# Altium PCB BOARDError.PcbDoc
Units mil, origin at the board's own origin, x right, y up, seen from the top; angles counter-clockwise.
Board outline 4100 x 2535 mil, 2 copper layers (Top Layer, Bottom Layer); 142 components, 97 nets, 538 pads, 0 vias.
Unrouted connection lines stored in the file: 16.
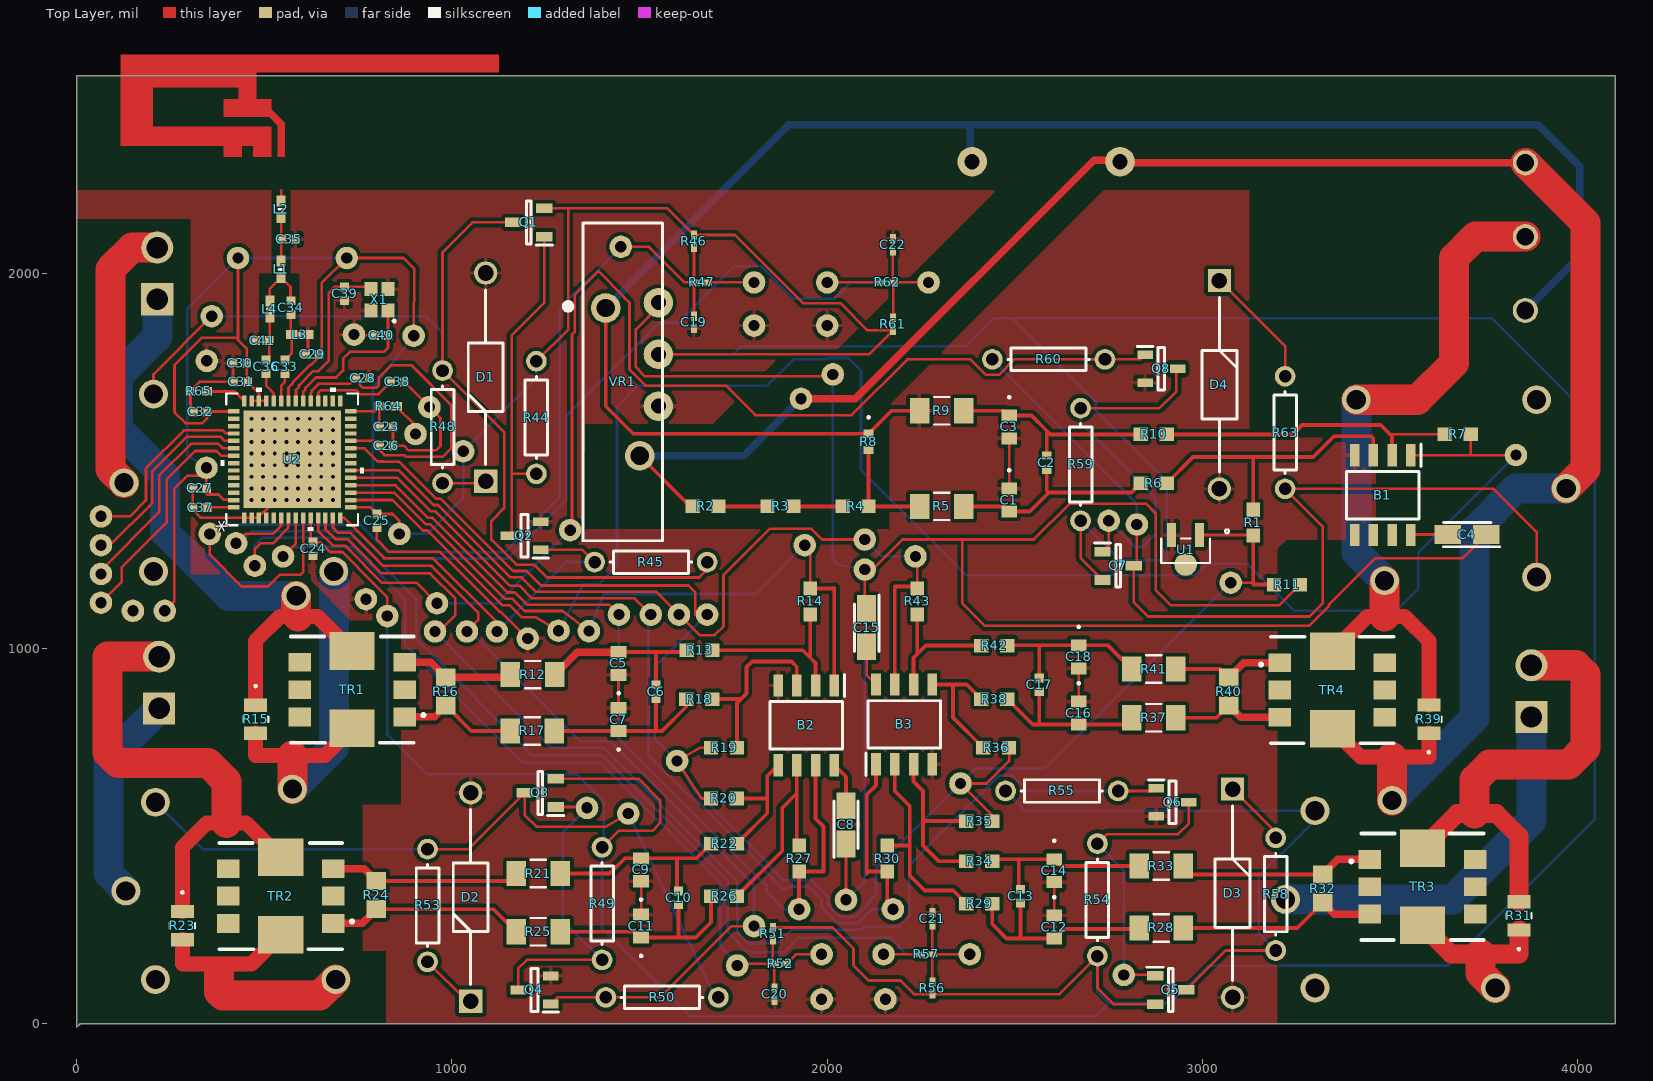
[diagram p0: Top Layer view]
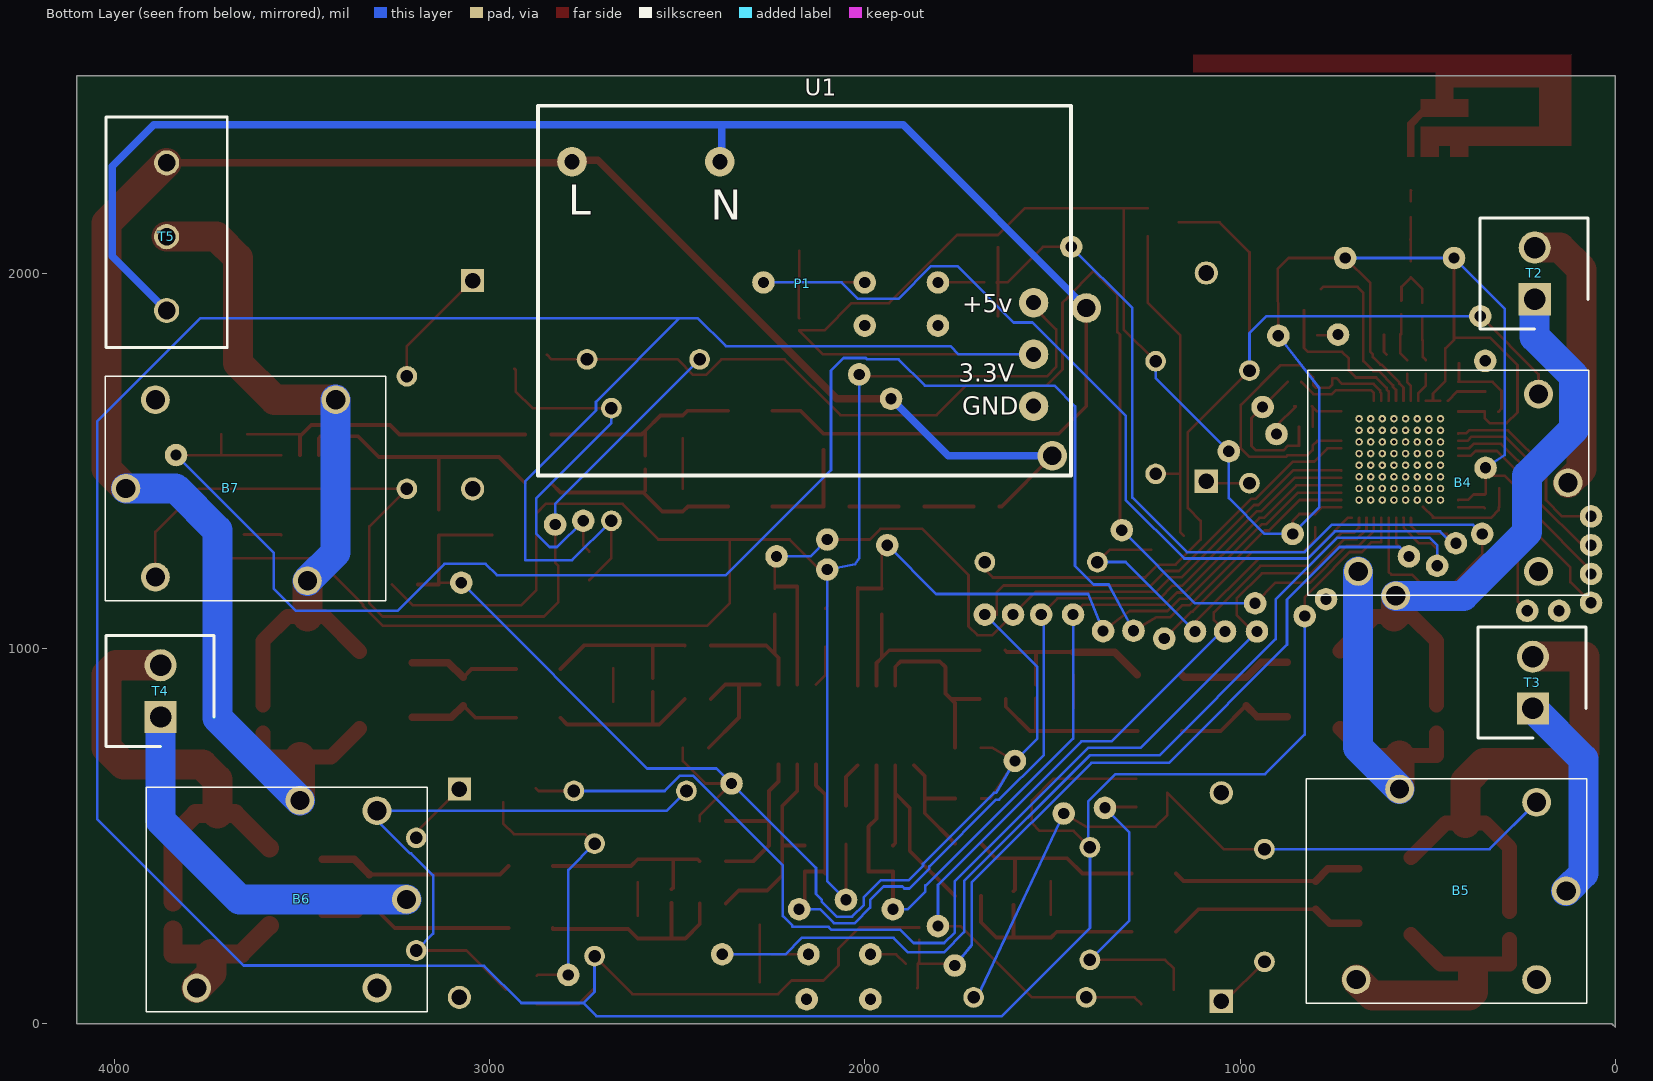
[diagram p1: Bottom Layer view, seen from below]

## Layer stack, top to bottom
Top Solder: solder mask 0.4, Solder Resist, Dk 3.5
Top Layer: signal copper 1.4
Dielectric 1: dielectric 12.6, FR-4, Dk 4.8
Bottom Layer: signal copper 1.4
Bottom Solder: solder mask 0.4, Solder Resist, Dk 3.5

## Board outline
0,2525 4100,2525 4100,0 10,0 0,-10

## Design rules (kind name [scope] priority, off if disabled: settings)
Clearance [All] p1: gap=10 ignorepadtopadclearanceinfootprint=FALSE except(0: Arc-Hole Track-Hole SMDPad-Hole THPad-Hole Via-Hole Fill-Hole Poly-Hole Region-Hole Text-Hole; 7: SMDPad-SMDPad)
PolygonConnect [All] p1: connectstyle=Relief reliefconductorwidth=10 reliefentries=4 polygonreliefangle="90 Angle" airgapwidth=10
RoutingVias [All] p1: holewidth=28 width=50 viastyle="Through Hole" minholewidth=28 minwidth=50 maxholewidth=28 maxwidth=50
ShortCircuit "Antenna Short" [InNet('Antenna') vs InNet('GND')] p1: allowed=TRUE
ShortCircuit "Neutral Short" [InNet('NEUTRAL_IN') vs InNet('GND')] p2: allowed=TRUE
ShortCircuit [All] p3: allowed=FALSE
SolderMaskExpansion [All] p1: expansion=4
Width [All] p1: maxlimit=80 minlimit=7 preferedwidth=20 minimp=50.000000 maximp=50.000000 favimp=50.000000
29 further rules are at their usual default settings.

## Classes and differential pairs
component class Sheet3: B3 C12 C13 C14 C15 C16 C17 C18 R28 R29 R30 R31 R32 R33 R34 R35 R36 R37 R38 R39 R40 R41 R42 R43 T4 T5 TR3 TR4
component class Sheet2: C5 C6 C7 C8 C9 C10 C11 R12 R13 R14 R15 R16 R17 R18 R19 R20 R21 R22 R23 R24 R25 R27 T5 TR1
component class Sheet1: B1 C2 C4 R1 R2 R3 R4 R5 R6 R7 R8 R9 R10 R11 U1
component class RSheet4: B7 C22 D4 Q7 Q8 R59 R60 R61 R62 R63
component class RSheet3: B6 C21 D3 Q5 Q6 R54 R55 R56 R57 R58
component class RSheet2: C20 D2 Q3 Q4 R49 R50 R51 R52 R53
component class RSheet1: B4 C19 D1 Q1 Q2 R44 R45 R46 R47 R48
component class ChipSheet1: C23 C24 C26 C28 C29 C30 C31 C32 C33 C34 C35 C36 C37 C38 L1 L3 L4 R64 R65

## Components (designator, comment, footprint, x,y, rotation, side; value= is the part's Value field where it differs from the comment)
B1 "LM2904AQS-13" SOIC127P600X175-8N 3480,1408.25 r270 top
B2 "LM2904AQS-13" SOIC127P600X175-8N 1944,795 r270 top
B3 "LM2904AQS-13" SOIC127P600X175-8N 2205,797.5 r90 top
B4 "HF3FA_005-HTF" HF3FA005HTF 126.26,1441.22 r0 bottom locked
B5 "HF3FA_005-HTF" HF3FA005HTF 131.26,353.78 r0 bottom
B6 "HF3FA_005-HTF" HF3FA005HTF 3220.94,331.22 r0 bottom
B7 "HF3FA_005-HTF" HF3FA005HTF 3968.74,1426.22 r180 bottom locked
C1 "06035A470JAT2A" 0603-M 2485,1395 r270 top value=47pF
C2 "CC0402JRX7R7BB153" CAPC1005X55N 2585,1495 r270 top value=15nF
C3 "06035A470JAT2A" 0603-M 2485,1590 r270 top value=47pF
C4 "TAJA225K020RNJ" CAPPM3216X180N 3705,1303.25 r180 top value=2.2uF
C5 "06035A470JAT2A" 0603-M 1444,960 r90 top value=47pF
C6 "CC0402JRX7R7BB153" CAPC1005X55N 1544,885 r90 top value=15nF
C7 "06035A470JAT2A" 0603-M 1444,810 r90 top value=47pF
C8 "TAJA225K020RNJ" CAPPM3216X180N 2050,530 r90 top value=2.2uF
C9 "06035A470JAT2A" 0603-M 1504,410 r90 top value=47pF
C10 "CC0402JRX7R7BB153" CAPC1005X55N 1604,335 r90 top value=15nF
C11 "06035A470JAT2A" 0603-M 1504,260 r90 top value=47pF
C12 "06035A470JAT2A" 0603-M 2605,257.5 r270 top value=47pF
C13 "CC0402JRX7R7BB153" CAPC1005X55N 2515,340 r270 top value=15nF
C14 "06035A470JAT2A" 0603-M 2605,407.5 r270 top value=47pF
C15 "TAJA225K020RNJ" CAPPM3216X180N 2105,1055 r270 top value=2.2uF
C16 "06035A470JAT2A" 0603-M 2670,827.5 r270 top value=47pF
C17 "CC0402JRX7R7BB153" CAPC1005X55N 2565,902.5 r270 top value=15nF
C18 "06035A470JAT2A" 0603-M 2670,977.5 r270 top value=47pF
C19 "Cap2" RESC0603X26N 1645,1868.78 r270 top value=0.1uF
C20 "Cap2" RESC0603X26N 1860,78.78 r270 top value=0.1uF
C21 "Cap2" RESC0603X26N 2280,280 r90 top value=0.1uF
C22 "Cap2" RESC0603X26N 2175,2075 r90 top value=0.1uF
C23 "GRM155R71H102KA01D" CAPC1005X55N 825,1590 r180 top value=1000pF
C24 "GRM155R70J104KA01D" CAPC1005X55N 630,1265 r90 top value=0.1uF
C25 "GRM155R70J104KA01D" CAPC1005X55N 800,1340 r90 top value=0.1uF
C26 "GRM155R70J104KA01D" CAPC1005X55N 825,1540 r180 top value=0.1uF
C27 "GRM155R61A105KE1" CAPC1005X55N 328,1426 r0 top value=1uF
C28 "GRM155R70J104KA01D" CAPC1005X55N 761.89,1720 r180 top value=0.1uF
C29 "GRM155R70J104KA01D" CAPC1005X55N 628,1783 r0 top value=0.1uF
C30 "GRM1555C1H221JA01D" CAPC1005X55N 435,1760 r0 top value=220pF
C31 "GRM155R70J104KA01D" CAPC1005X55N 436.89,1710 r0 top value=0.1uF
C32 "GRM155R70J104KA01D" CAPC1005X55N 330,1630 r0 top value=0.1uF
C33 "GRM1555C1H180JA01D" CAPC1005X55N 555,1750 r90 top
C34 "GRM1555C1H1R0BA01D" CAPC1005X55N 571,1908 r90 top
C35 "GRM1555C1H1R2CA01D" CAPC1005X55N 565,2090 r180 top
C36 "GRM1555C1H180JA01D" CAPC1005X55N 505,1750 r90 top
C37 "GRM155R61A105KE1" CAPC1005X55N 329,1375 r0 top value=1uF
C38 "GRM155R61A105KE1" CAPC1005X55N 855,1710 r180 top value=1uF
C39 "GRM1555C1H120JA01D" CAPC1005X55N 714,1944.89 r90 top value=12pF
C40 "GRM1555C1H120JA01D" CAPC1005X55N 812,1834 r0 top value=12pF
C41 "GRM1555C1H1R0BA01D" CAPC1005X55N 495,1820 r0 top
D1 "1N4007" DIOAD1408W86L464D236 1090,1445 r90 top
D2 "1N4007" DIOAD1408W86L464D236 1050,59.88 r90 top
D3 "1N4007" DIOAD1408W86L464D236 3080,625.12 r270 top
D4 "1N4007" DIOAD1408W86L464D236 3045,1980 r270 top
L1 "LQG15HS2N0S02D" INDC1005X55N 545,2010 r90 top
L2 "LQG15HS3N3S02D" INDC1005X55N 545,2170 r90 top
L3 "LQG15HS2N0S02D" INDC1005X55N 595,1836 r180 top
L4 "LQG15HS2N0S02D" INDC1005X55N 515,1904 r90 top
P1 "Relay" BT_SMPS 2170,1965 r180 bottom locked
Q1 "DMG2305UX" SOT96P240X100-3N 1205,2135 r180 top
Q2 "2N7002" SOT95P230X110-3N 1193.31,1300 r180 top
Q3 "DMG2305UX" SOT96P240X100-3N 1235,615 r180 top
Q4 "2N7002" SOT95P230X110-3N 1220,90 r180 top
Q5 "DMG2305UX" SOT96P240X100-3N 2915,90 r0 top
Q6 "2N7002" SOT95P230X110-3N 2920,590 r0 top
Q7 "DMG2305UX" SOT96P240X100-3N 2775,1220 r0 top
Q8 "2N7002" SOT95P230X110-3N 2890,1745 r0 top
R1 "RT0603DRD07330KL" RC0603N-M 3135,1335 r270 top value=330K
R2 "RT0603DRD07330KL" RC0603N-M 1676,1378.25 r0 top value=330K
R3 "RT0603DRD07330KL" RC0603N-M 1875.5,1378.25 r0 top value=330K
R4 "RT0603DRD07330KL" RC0603N-M 2075.5,1378.25 r0 top value=330K
R5 "RC1206FR-071KL" RC1206N-M 2305,1378.25 r180 top value=1k
R6 "RT0603DRD07330KL" RC0603N-M 2870,1440 r0 top value=330K
R7 "RT0603DRD07330KL" RC0603N-M 3680,1570 r0 top value=330K
R8 "RR0510P-302-D" RES_0510-M 2110,1550 r270 top value=3.0K
R9 "RC1206FR-071KL" RC1206N-M 2305,1633.25 r180 top value=1K
R10 "RT0603DRD07330KL" RC0603N-M 2870,1570 r0 top value=330K
R11 "RC0603FR-071KL" RC0603N-M 3225,1170 r180 top value=1K
R12 "RC1206FR-071KL" RC1206N-M 1215,930 r180 top value=1K
R13 "RT0603DRD07330KL" RC0603N-M 1660,995 r0 top value=330K
R14 "RT0603DRD07330KL" RC0603N-M 1955,1125 r90 top value=330K
R15 "KRL1220E-M-R010-F-T5" RES_1220-M 477,811.35 r270 top value=10m
R16 "RT0805DRD0710RL" RC0805N-M 984,885 r90 top value=10
R17 "RC1206FR-071KL" RC1206N-M 1214,780 r180 top value=1K
R18 "RT0603DRD07330KL" RC0603N-M 1659,865 r0 top value=330K
R19 "RT0603DRD07330KL" RC0603N-M 1725,735 r180 top value=330K
R20 "RT0603DRD07330KL" RC0603N-M 1724.5,600 r180 top value=330K
R21 "RC1206FR-071KL" RC1206N-M 1230,400 r180 top value=1K
R22 "RT0603DRD07330KL" RC0603N-M 1725,480 r0 top value=330K
R23 "KRL1220E-M-R010-F-T5" RES_1220-M 282,261.35 r270 top value=10m
R24 "RT0805DRD0710RL" RC0805N-M 799,342.5 r90 top value=10
R25 "RC1206FR-071KL" RC1206N-M 1230,245 r180 top value=1K
R26 "RT0603DRD07330KL" RC0603N-M 1725,340 r0 top value=330K
R27 "RT0603DRD07330KL" RC0603N-M 1925,440 r270 top value=330K
R28 "RC1206FR-071KL" RC1206N-M 2890,255 r0 top value=1K
R29 "RT0603DRD07330KL" RC0603N-M 2405,320 r180 top value=330K
R30 "RT0603DRD07330KL" RC0603N-M 2160,440 r270 top value=330K
R31 "KRL1220E-M-R010-F-T5" RES_1220-M 3843,287 r90 top value=10m
R32 "RT0805DRD0710RL" RC0805N-M 3320,360 r270 top value=10
R33 "RC1206FR-071KL" RC1206N-M 2890,420 r0 top value=1K
R34 "RT0603DRD07330KL" RC0603N-M 2405,432.5 r180 top value=330K
R35 "RT0603DRD07330KL" RC0603N-M 2405,540 r0 top value=330K
R36 "RT0603DRD07330KL" RC0603N-M 2450,735 r0 top value=330K
R37 "RC1206FR-071KL" RC1206N-M 2870,815 r0 top value=1K
R38 "RT0603DRD07330KL" RC0603N-M 2445,865 r180 top value=330K
R39 "KRL1220E-M-R010-F-T5" RES_1220-M 3603,811.5 r90 top value=10m
R40 "RT0805DRD0710RL" RC0805N-M 3070,885 r270 top value=10
R41 "RC1206FR-071KL" RC1206N-M 2870,945 r0 top value=1K
R42 "RT0603DRD07330KL" RC0603N-M 2445,1007.5 r180 top value=330K
R43 "RT0603DRD07330KL" RC0603N-M 2240,1125 r90 top value=330K
R44 "Res1" AXIAL-0.3 1225,1615 r90 top value=1K
R45 "Res1" AXIAL-0.3 1530,1230 r180 top value=10K
R46 "Res1" RESC0603X26N 1645,2085 r90 top value=100K
R47 "Res1" RESC0603X26N 1665,1975 r0 top value=1K
R48 "" AXIAL-0.3 975,1590 r90 top value=33
R49 "Res1" AXIAL-0.3 1400,320 r90 top value=1K
R50 "Res1" AXIAL-0.3 1560,70 r180 top value=10K
R51 "Res1" RESC0603X26N 1855,240 r90 top value=100K
R52 "Res1" RESC0603X26N 1875,160 r0 top value=1K
R53 "" AXIAL-0.3 935,315 r90 top value=33
R54 "Res1" AXIAL-0.3 2720,330 r270 top value=1K
R55 "Res1" AXIAL-0.3 2625,620 r0 top value=10K
R56 "Res1" RESC0603X26N 2280,95 r270 top value=100K
R57 "Res1" RESC0603X26N 2263.78,185 r180 top value=1K
R58 "" AXIAL-0.3 3195,345 r270 top value=33
R59 "Res1" AXIAL-0.3 2675,1490 r270 top value=1K
R60 "Res1" AXIAL-0.3 2590,1770 r0 top value=10K
R61 "Res1" RESC0603X26N 2175,1863.78 r270 top value=100K
R62 "Res1" RESC0603X26N 2160,1975 r180 top value=1K
R63 "" AXIAL-0.3 3220,1575 r270 top value=33
R64 "CRCW04022K20JNED" RESC1005X40N#1 830,1645 r0 top value=2.2k
R65 "RK73H1ETTP5602F" RESC1005X40N#2 325,1685 r0 top value=56k
T2 "1727010" SHDR2W90P0X350_1X2_750X730X850P 215,1930 r90 bottom (schematic designator T5)
T3 "1727010" SHDR2W90P0X350_1X2_750X730X850P 220,840 r90 bottom
T4 "1727010" SHDR2W90P0X350_1X2_750X730X850P 3876.06,817.2 r90 bottom locked
T5 "282836-3" 282836-3 3860,2293.7 r270 bottom locked (schematic designator T2)
TR1 "53100C" 53050C 734,890 r90 top
TR2 "53100C" 53050C 544,340 r90 top
TR3 "53100C" 53050C 3586.04,364.83 r270 top
TR4 "53100C" 53050C 3346.04,889 r270 top
U1 "LM4041D12IDBZR" DBZ3-M 2955,1260 r180 top value=Value
U2 "CC2538_RTQ_56" RTQ56_6P7X6P7 574.5,1503.5 r90 top locked value=Value
VR1 "B72220S0271K101" B722(21.5X5.4) 1455,1710 r270 top
X1 "FA-128_32.0000MF20X-K3" FA128 807,1929 r90 top

## Footprints (in the part's own frame and the unit in brackets; to place one, negate y for a bottom-side part, rotate by r counter-clockwise, add the part's x,y. Pads: shape width x height; smd on the part's side, far side on the other; paste and mask are expansions set on the pad)
0603-M [mil]
  rect 32x42 smd paste+0 mask+0: 1(-30.5,0) 2(30.5,0)
  silkscreen extent -82,-3 -77,3, body extent 0,0 10,10, height 10
53050C [mm]
  rect 1.27x1.52 smd: 1(-1.85,-3.555) 2(0,-3.555) 3(1.85,-3.555) 4(1.85,3.555) 5(0,3.555) 6(-1.85,3.555)
  rect 2.54x3.05 smd: 7(2.615,0) 8(-2.615,0)
  silkscreen extent -3.6,-4.9 3.6,4.15
282836-3 [mm]
  round 1.7 hole 1.2: 1(0,0) 2(5,0) 3(10,0)
  silkscreen extent -3.1,-4.1 12.5,4.1
AXIAL-0.3 [mm] "Axial Device, Thru-Hole; 2 Leads; 0.3 in Pin Spacing"
  round 1.4 hole 0.85: 1(-3.81,0) 2(3.81,0)
  silkscreen extent -2.77,-0.76 2.77,0.76
B722(21.5X5.4) [mm]
  round 2 hole 1.25: 1(-5,-1.15) 2(5,1.15)
  silkscreen extent -10.75,-3.91 10.75,2.7
BT_SMPS [mm]
  round 2 hole 1.02: 1(-15.494,8.423) 2(-5.491,8.423) 3(15.743,-1.118) 4(15.743,-4.615) 5(15.743,-8.118)
  silkscreen extent -17.79,-12.81 18.28,12.21
CAPC1005X55N [mm]
  rect 0.6x0.62 smd: 1(-0.46,0) 2(0.46,0)
CAPPM3216X180N [mm]
  rect 1.8x1.3 smd: 1(-1.3,0) 2(1.3,0)
  silkscreen extent -2.2,-0.82 1.6,0.82
DBZ3-M [mil]
  rect 24x64 smd paste+0 mask+0: 1(-37.4,-42) 2(37.4,-42)
  round 60 smd: 3(0,36.75)
  silkscreen extent -115,-57 65,33, body extent 0,0 10,10, height 10
DIOAD1408W86L464D236 [mm]
  rect 1.575x1.575 / inner round 1.575 / far side rect 1.575x1.575 hole 1.05: 1(0,0)
  round 1.575 hole 1.05: 2(14.1,0)
  silkscreen extent 1.14,-1.18 12.96,1.18
FA128 [mm]
  rect 0.95x0.85 smd: 1(-0.725,-0.575) 2(0.725,-0.575) 3(0.725,0.575) 4(-0.725,0.575)
  silkscreen extent -1.49,-1.04 -1.41,-0.96
HF3FA005HTF [mm]
  round 1.95 hole 1.3: 1(2,-6) 2(0,0) 3(2,6) 4(14.2,6)
  silkscreen extent -1.4,-7.6 17.6,7.6
INDC1005X55N [mm]
  rect 0.75x0.6 smd: 1(-0.55,0) 2(0.55,0)
  silkscreen extent 0,-0.15 0,0.15
RC0603N-M [mil]
  rect 38x36 smd paste+0 mask+0: 1(-34.5,0) 2(34.5,0)
  body extent 0,0 10,10, height 10
RC0805N-M [mil]
  rect 48x52 smd paste+0 mask+0: 1(-37.5,0) 2(37.5,0)
  body extent 0,0 10,10, height 10
RC1206N-M [mil]
  rect 52x67 smd paste+0 mask+0: 1(-59,0) 2(59,0)
  silkscreen extent -20,-36 20,36, body extent 0,0 10,10, height 10
RES_0510-M [mil]
  rect 21.84x25.65 smd paste+0 mask+0: 1(-21.75,0) 2(21.75,0)
  silkscreen extent -69,-3 -63,3, body extent 0,0 10,10, height 10
RES_1220-M [mil]
  rect 35.62x61.09 smd paste+0 mask+0: 1(-37.5,0) 2(37.5,0)
  silkscreen extent -91,-34 7,34, body extent 0,0 10,10, height 10
RESC0603X26N [mm]
  rect 0.625x0.4 smd: 1(-0.412,0) 2(0.412,0)
RESC1005X40N#1 [mm]
  rect 0.75x0.6 smd: 1(-0.55,0) 2(0.55,0)
RESC1005X40N#2 [mm]
  rect 0.7x0.6 smd: 1(-0.55,0) 2(0.55,0)
RTQ56_6P7X6P7 [mil]
  rect 29.68x11.81 smd paste-5.91: 1(-155.93,127.95) 2(-155.93,108.27) 3(-155.93,88.58) 4(-155.93,68.9) 5(-155.93,49.21) 6(-155.93,29.53) 7(-155.93,9.84) 8(-155.93,-9.84) 9(-155.93,-29.53) 10(-155.93,-49.21) 11(-155.93,-68.9) 12(-155.93,-88.58) 13(-155.93,-108.27) 14(-155.93,-127.95) 29(155.93,-127.95) 30(155.93,-108.27) 31(155.93,-88.58) 32(155.93,-68.9) 33(155.93,-49.21) 34(155.93,-29.53) 35(155.93,-9.84) 36(155.93,9.84) 37(155.93,29.53) 38(155.93,49.21) 39(155.93,68.9) 40(155.93,88.58) 41(155.93,108.27) 42(155.93,127.95)
  rect 11.81x29.68 smd paste-5.91: 15(-127.99,-155.93) 16(-108.3,-155.93) 17(-88.61,-155.93) 18(-68.91,-155.93) 19(-49.22,-155.93) 20(-29.53,-155.93) 21(-9.84,-155.93) 22(9.84,-155.93) 23(29.53,-155.93) 24(49.22,-155.93) 25(68.91,-155.93) 26(88.61,-155.93) 27(108.3,-155.93) 28(127.99,-155.93) 43(127.99,155.93) 44(108.3,155.93) 45(88.61,155.93) 46(68.91,155.93) 47(49.22,155.93) 48(29.53,155.93) 49(9.84,155.93) 50(-9.84,155.93) 51(-29.53,155.93) 52(-49.22,155.93) 53(-68.91,155.93) 54(-88.61,155.93) 55(-108.3,155.93) 56(-127.99,155.93)
  rect 259.84x259.84 smd paste-129.42 mask-129.5: 57(0,0)
  round 20 / inner round 60 / far side round 20 hole 10: V(-108.5,-108.5) V(-108.5,-77.5) V(-108.5,-46.5) V(-108.5,-15.5) V(-108.5,15.5) V(-108.5,46.5) V(-108.5,77.5) V(-108.5,108.5) V(-77.5,-108.5) V(-77.5,-77.5) V(-77.5,-46.5) V(-77.5,-15.5) V(-77.5,15.5) V(-77.5,46.5) V(-77.5,77.5) V(-77.5,108.5) V(-46.5,77.5) V(-46.5,108.5) V(-46.5,-46.5) V(-46.5,-15.5) V(-46.5,15.5) V(-46.5,46.5) V(-46.5,-108.5) V(-46.5,-77.5) V(-15.5,108.5) V(-15.5,77.5) V(-15.5,46.5) V(-15.5,15.5) V(-15.5,-15.5) V(-15.5,-46.5) V(-15.5,-77.5) V(-15.5,-108.5) V(15.5,108.5) V(15.5,77.5) V(15.5,46.5) V(15.5,15.5) V(15.5,-15.5) V(15.5,-46.5) V(15.5,-77.5) V(15.5,-108.5) V(46.5,77.5) V(46.5,108.5) V(46.5,-46.5) V(46.5,-15.5) V(46.5,15.5) V(46.5,46.5) V(46.5,-108.5) V(46.5,-77.5) V(77.5,-108.5) V(77.5,-77.5) V(77.5,-46.5) V(77.5,-15.5) V(77.5,15.5) V(77.5,46.5) V(77.5,77.5) V(77.5,108.5) V(108.5,-108.5) V(108.5,-77.5) V(108.5,-46.5) V(108.5,-15.5) V(108.5,15.5) V(108.5,46.5) V(108.5,77.5) V(108.5,108.5)
  silkscreen extent -191,-191 191,191, body extent 0,0 10,10, height 10
SHDR2W90P0X350_1X2_750X730X850P [mm]
  rect 2.175x2.175 / inner round 2.175 / far side rect 2.175x2.175 hole 1.45: 1(0,0)
  round 2.175 hole 1.45: 2(3.5,0)
  silkscreen extent -2,-3.6 5.5,3.7
SOIC127P600X175-8N [mm]
  rect 1.5x0.65 smd: 1(-2.7,1.905) 2(-2.7,0.635) 3(-2.7,-0.635) 4(-2.7,-1.905) 5(2.7,-1.905) 6(2.7,-0.635) 7(2.7,0.635) 8(2.7,1.905)
  silkscreen extent -3.45,-2.45 1.6,2.58
SOT95P230X110-3N [mm]
  rect 1.05x0.6 smd: 1(-1.1,0.95) 2(-1.1,-0.95) 3(1.1,0)
  silkscreen extent -1.63,-1.45 0.23,1.5
SOT96P240X100-3N [mm]
  rect 1.1x0.65 smd: 1(-1.05,0.96) 2(-1.05,-0.96) 3(1.05,0)
  silkscreen extent -1.6,-1.45 0.15,1.54

## Part data
B1 B2 B3: library part LM2904AS-13, "https://www.diodes.com/assets/Datasheets/LM2902_04.pdf", Manufacturer_Name="Diodes Inc.", Datasheet Link=https://www.diodes.com/assets/Datasheets/LM2902_04.pdf, Geometry.Height=1.75mm, Manufacturer_Part_Number=LM2904AS-13, Supplier_Name=RS
B4 B5 B6 B7: "Subminiature high power relay. 10A 5V.", Manufacturer_Name=Hongfa, Manufacturer_Part_Number=HF3FA/005-HTF, Datasheet Link=http://www.hongfa.com/pro/pdf/HF3FA_en.pdf, Geometry.Height=15mm, Supplier_Name=RS
C1 C2 C3 C4 C5 C6 C7 C8 C9 C10 C11 C12 C13 C14 C15 C16 C17 C18: library part Cap, "Capacitor", LatestRevisionDate=17-Jul-2002, LatestRevisionNote="Re-released for DXP Platform.", PackageDescription="Radial Cap, Thru-Hole; 2 Leads; 0.3 in Pin Spacing", PackageReference=RAD-0.3, Published=8-Jun-2000, Publisher="Altium Limited"
C19 C20 C21 C22: "Capacitor", PackageDescription="Capacitor; 2 Leads", PackageReference=CAPR5-4X5, Published=23-Sep-2002, Publisher="Altium Limited"
C23: "MURATA - GRM155R71H102KA01D - CAP, MLCC, X7R, 1NF, 50V, 0402", Manufacturer_Name="Murata Electronics", RS Part Number=7235266, Datasheet Link=http://www.murata.com/~/media/webrenewal/support/library/catalog/products/capacitor/mlcc/c02e.pdf, Geometry.Height=0.55mm, Manufacturer_Part_Number=GRM155R71H102KA01D, Supplier_Name=RS
C24 C25 C26 C28 C29 C31 C32: "Capacitor MLCC GRM 0402 100nF 6.3V X7R Murata 0402 GRM 100nF Ceramic Multilayer Capacitor, 6.3 V dc, +125degC, X7R Dielectric,  /-10% SMD", Manufacturer_Name="Murata Electronics", RS Part Number=8145265, Datasheet Link=http://www.murata.com/~/media/webrenewal/support/library/catalog/products/capacitor/mlcc/c02e.pdf, Geometry.Height=0.55mm, Manufacturer_Part_Number=GRM155R70J104KA01D, Supplier_Name=RS
C27 C37 C38: "Imported", Manufacturer_Part_Number=GRM155R61A105KE15D, C="Copyright (C) 2016 Accelerated Designs. All rights reserved", Copyright="Copyright (C) 2016 Accelerated Designs. All rights reserved", Vendor=Murata
C30: "Cap,Ceramic,0402,220pF 50V Murata 0402 GRM 220pF Ceramic Multilayer Capacitor, 50 V dc C0G Dielectric 5% SMD", Manufacturer_Name="Murata Electronics", RS Part Number=6242941, Datasheet Link=http://www.murata.com/~/media/webrenewal/support/library/catalog/products/capacitor/mlcc/c02e.pdf, Geometry.Height=0.55mm, Manufacturer_Part_Number=GRM1555C1H221JA01D, Supplier_Name=RS
C33 C36: "Ceramic  SMT capacitor 18pF 50Vdc Murata 0402 GRM 18pF Ceramic Multilayer Capacitor, 50 V dc C0G Dielectric 5%", Manufacturer_Name="Murata Electronics", RS Part Number=7235382, Datasheet Link=http://www.murata.com/~/media/webrenewal/support/library/catalog/products/capacitor/mlcc/c02e.pdf, Geometry.Height=0.55mm, Manufacturer_Part_Number=GRM1555C1H180JA01D, Supplier_Name=RS
C34 C41: "Ceramic  SMT capacitor 1pF 50Vdc Murata 0402 GRM 1pF Ceramic Multilayer Capacitor, 50 V dc, +125C, C0G Dielectric, 0.1pF", Manufacturer_Name="Murata Electronics", RS Part Number=7235335, Datasheet Link=http://www.murata.com/~/media/webrenewal/support/library/catalog/products/capacitor/mlcc/c02e.pdf, Geometry.Height=0.55mm, Manufacturer_Part_Number=GRM1555C1H1R0BA01D, Supplier_Name=RS
C35: "MURATA - GRM1555C1H1R2CA01D - CAP, MLCC, C0G/NP0, 1.2PF, 50V, 0402", Manufacturer_Name="Murata Electronics", RS Part Number=7235348, Datasheet Link=http://www.murata.com/~/media/webrenewal/support/library/catalog/products/capacitor/mlcc/c02e.pdf, Geometry.Height=0.55mm, Manufacturer_Part_Number=GRM1555C1H1R2CA01D, Supplier_Name=RS
C39 C40: "Ceramic  SMT capacitor 12pF 50Vdc Murata 0402 GRM 12pF Ceramic Multilayer Capacitor, 50 V dc C0G Dielectric 5%", Manufacturer_Name="Murata Electronics", RS Part Number=7235367, Datasheet Link=http://www.murata.com/~/media/webrenewal/support/library/catalog/products/capacitor/mlcc/c02e.pdf, Geometry.Height=0.55mm, Manufacturer_Part_Number=GRM1555C1H120JA01D, Supplier_Name=RS
D1 D2 D3 D4: library part 1N4007-T, "Diode Standard 1A 1000V 1Vf DO41 Diodes Inc 1N4007-T, Switching Diode, 1000V 1A, 2-Pin DO-41", Manufacturer_Name="Diodes Inc.", RS Part Number=7384724P, Datasheet Link=http://docs-europe.electrocomponents.com/webdocs/1383/0900766b81383fbb.pdf, Geometry.Height=mm, Manufacturer_Part_Number=1N4007-T, Supplier_Name=RS
L1 L3 L4: "Inductor SMD 0402 2nH 300mA Murata LQQ15HS Series Wire-wound SMD Inductor 0.002 ??H ??0.3nH 300mA Idc Q:8", Manufacturer_Name="Murata Electronics", RS Part Number=7926338, Datasheet Link=http://psearch.en.murata.com/inductor/product/LQG15HS2N0S02#.pdf, Geometry.Height=0.55mm, Manufacturer_Part_Number=LQG15HS2N0S02D, Supplier_Name=RS
L2: "Murata Wire-wound SMD Inductor 0.0033 H 0.3nH 300mA Idc Q:8", Manufacturer_Name="Murata Electronics", RS Part Number=0107356, Datasheet Link=http://psearch.en.murata.com/inductor/product/LQG15HS3N3S02#.pdf, Geometry.Height=0.55mm, Manufacturer_Part_Number=LQG15HS3N3S02D, Supplier_Name=RS
P1: "SPDT Relay", LatestRevisionDate=17-Jul-2002, LatestRevisionNote="Re-released for DXP Platform.", PackageReference=MODULE5B, Published=8-Jun-2000, Publisher="Altium Limited"
Q1 Q3 Q5 Q7: library part DMG2305UX-7, "MOSFET P-Ch 20V 5A Enhancement SOT23 Diodes Inc DMG2305UX-7 P-channel MOSFET Transistor, -3.3 A, -20 V, 3-Pin SOT-23", Manufacturer_Name="Diodes Inc.", RS Part Number=1219640, Allied_Number=70550282, Datasheet Link=http://www.diodes.com/_files/datasheets/DMG2305UX.pdf, Geometry.Height=1mm, Manufacturer_Part_Number=DMG2305UX-7, Supplier_Name=RS
Q2 Q4 Q6 Q8: library part 2N7002_215, "MOSFET N-Channel 60V 0.3A TO236AB NXP 2N7002,215 N-channel MOSFET Transistor, 0.3 A, 60 V, 3-Pin TO-236AB", Manufacturer_Name=Nexperia, Manufacturer_Part_Number=2N7002,215, RS Part Number=1125526, Datasheet Link=http://uk.rs-online.com/web/p/products/4367379, Geometry.Height=1.1mm, Supplier_Name=RS
R1 R2 R3 R4 R5 R6 R7 R8 R9 R10 R11 R12 R13 R14 R15 R16 R17 R18 R19 R20 R21 R22 R23 R24 R25 R26 R27 R28 R29 R30 R31 R32 R33 R34 R35 R36 R37 R38 R39 R40 R41 R42 R43: library part Res2, "Resistor", LatestRevisionDate=17-Jul-2002, LatestRevisionNote="Re-released for DXP Platform.", PackageDescription="Axial Device, Thru-Hole; 2 Leads; 0.4 in Pin Spacing", PackageReference=AXIAL-0.4, Published=8-Jun-2000, Publisher="Altium Limited"
R44 R45 R46 R47 R49 R50 R51 R52 R54 R55 R56 R57 R59 R60 R61 R62: "Resistor", LatestRevisionDate=17-Jul-2002, LatestRevisionNote="Re-released for DXP Platform.", PackageDescription="Axial Device, Thru-Hole; 2 Leads; 0.3 in Pin Spacing", PackageReference=AXIAL-0.3, Published=8-Jun-2000, Publisher="Altium Limited"
R48 R53 R58 R63: library part Res1, "Resistor", LatestRevisionDate=17-Jul-2002, LatestRevisionNote="Re-released for DXP Platform.", PackageDescription="Axial Device, Thru-Hole; 2 Leads; 0.3 in Pin Spacing", PackageReference=AXIAL-0.3, Published=8-Jun-2000, Publisher="Altium Limited"
R64: "Vishay CRCW Series Thick Film Resistor 0402 Case 2.2k 5% 0.063W 200ppm/K", Manufacturer_Name=Vishay, RS Part Number=8318680, Datasheet Link=http://www.vishay.com/docs/20035/dcrcwe3.pdf, Geometry.Height=0.4mm, Manufacturer_Part_Number=CRCW04022K20JNED, Supplier_Name=RS
R65: "Thick Film Resistors - SMD 56K OHM 1%", Manufacturer_Name="KOA Speer", Datasheet Link=http://www.mouser.com/ds/2/219/RK73H-5715.pdf, Geometry.Height=0.4mm, Manufacturer_Part_Number=RK73H1ETTP5602F, Supplier_Name=RS
T2 T3 T4: "2 way vertical screw header,3.81mm pitch Phoenix Contact Non-Fused Terminal Block, 2 Way, Solder Terminals, 30 ??? 16 AWG Through Hole, Nylon, 400 V", Manufacturer_Name="Phoenix Contact", RS Part Number=1015384, Allied_Number=70054357, Datasheet Link=http://docs-europe.electrocomponents.com/webdocs/13d6/0900766b813d6966.pdf, Geometry.Height=8.5mm, Manufacturer_Part_Number=1727010, Supplier_Name=RS
T5: "3 way PCB screw terminal,5mm pitch", Manufacturer_Name="Phoenix Contact", Manufacturer_Part_Number=1727010, RS Part Number=1015384, Allied_Number=70054357, Datasheet Link=http://docs-europe.electrocomponents.com/webdocs/13d6/0900766b813d6966.pdf, Geometry.Height=8.5mm, Supplier_Name=RS
TR1 TR2 TR3 TR4: library part 53050C, "Current sensing transformer SMD 1:50 Murata Power Solutions 10A Surface Mount Current Transformer, 1:50", Manufacturer_Name="Murata Electronics", RS Part Number=7157021P, Allied_Number=R1031173, Datasheet Link=http://docs-europe.electrocomponents.com/webdocs/0eb1/0900766b80eb1ad8.pdf, Manufacturer_Part_Number=53050C, Supplier_Name=RS
U1: "Imported", Manufacturer="Texas Instruments", Built_By=EMA_UL_Team, C="Copyright (C) 2015 Accelerated Designs. All rights reserved", Manufacturer_Part_Number=LM4041D12IDBZR, RefDes=RefDes, Type=Type, Vendor="Texas Instruments"
U2: "Imported", Manufacturer_Part_Number=cc2538_rtq_56, RefDes=RefDes, Type=Type, Vendor="Texas Instruments"
VR1: library part "Res Varistor", "Varistor (Voltage-Sensitive Resistor)", Code_IPC=RESC2012, LatestRevisionDate=29-May-2009, LatestRevisionNote="IPC-7351 Footprint Added.", PackageDescription="Chip Resistor 0805 Case Size", PackageReference=6-0805, PackageVersion=Mar-2003, Published=24-Mar-1999, Publisher="Altium Limited"
X1: "MHz range crystal unit, FA-128", Manufacturer_Name=EPSON, Manufacturer_Part_Number="FA-128 32.0000MF20X-K3", Datasheet Link=https://support.epson.biz/td/api/doc_check.php?dl=brief_FA-128&amp;lang=en, Geometry.Height=mm, Supplier_Name=RS

## Free pads (board coordinates)
  round 60 hole 30: 13(65,1351.67) 14(65,1275) 15(65,1198.33) 16(65,1121.67) 20(1805,1975) 21(2000,1975) 22(1985,185) 23(2150,185) 24(1805,1860) 25(2000,1860) 26(1985,65) 27(2155,65) 32(1470,560) 33(1360,575) 34(2790,130) 35(2825,1330) 36(360,1885) 37(1930,1665) 39(2100,1210) 40(2050,330) 41(2750,1340) 42(2015,1730) 43(3075,1175) 44(1600,700) 45(2355,640) 46(1450,2070) 47(2270,1975) 48(1940,1275) 50(1760,155) 51(2380,185) 52(1925,305) 53(2175,305) 54(1030,1525) 55(860,1305) 56(430,2040) 57(720,2040) 58(903,1571) 60(2235,1245) 61(2100,1290) 62(1805,260) 65(425,1280) 66(475,1220) 67(550,1245) 69(1680,1090) 70(1605,1090) 71(1530,1090) 73(1445,1090) 74(1365,1046) 75(1284,1047) 76(1120,1045) 77(1040,1045) 78(955,1045) 80(346,1481) 81(3835,1515) 83(828,1086) 85(960,1120) 86(1315,1315) 87(355,1305) 88(898,1833) 89(150,1100) 90(235,1100) 92(739,1836) 93(1202,1026) 94(347,1766) 95(940,1643) 96(771,1131)
  round 76.77 hole 51.18: 28(575,625) 29(585,1140) 30(3485,1180) 31(3505,595)

## Nets (pads, with @x,y where several pads share a name; then routed paths per layer and width w, separated by ;. In a path a pad name is that pad's centre, name@x,y a point inside that pad or via, vN(x,y) a via of type N, cw(c..) or ccw(c..) an arc to the next point about the centre after c; other vN are vias at no path point)
Antenna: L2.2 | length 28.4
  Top Layer w7: 544.77,2220 545,2219.77 L2.2
CURRENT_CH_1: B2.1 pad.48 pad.74 R14.2 U2.17 | length 1924.9
  Top Layer w7: U2.17 845.87,1414.89 929.83,1330.94 941.89,1330.94 1140.83,1132 1160.96,1132 1193.46,1099.5 1294.5,1099.5 pad.74 ; pad.48 1955,1260 R14.2
  Top Layer w10: R14.2 2017.5,1159.5 2019,1161 B2.1
  Bottom Layer w7: pad.74 1405,1145 1810,1145 pad.48
CURRENT_CH_2: B2.7 pad.52 pad.73 R27.2 U2.18 | length 2324.2
  Top Layer w7: U2.18 850.22,1434.59 936.87,1347.94 948.93,1347.94 1147.88,1149 1168,1149 1200.5,1116.5 1418.5,1116.5 pad.73
  Top Layer w10: pad.52 R27.2 1989.5,405.5 1990,405 1990,525 1969,546 B2.7
  Bottom Layer w7: pad.73 1445,760 1835.92,369.08 1839,369.08 1839,351.4 1885.4,305 pad.52
CURRENT_CH_3: B3.1 pad.53 pad.71 R30.2 U2.19 | length 2666.2
  Top Layer w7: U2.19 854.58,1454.28 943.91,1364.94 955.98,1364.94 1153.92,1167 1180,1167 1213.5,1133.5 1486.5,1133.5 pad.71
  Top Layer w10: B3.1 2130,635 2105,610 2105,400 2110.5,405.5 R30.2 2160,320 pad.53
  Bottom Layer w7: pad.71 1523,1083 1523,715.48 1641.77,596.71 1650.02,596.71 1828,418.73 1828,412.96 1880.66,360.3 1894.74,360.3 1899.94,365.5 1950.06,365.5 1985.5,330.06 1985.5,308.94 2026.44,268 2082.04,268 2119.04,305 pad.53
CURRENT_CH_4: B3.7 pad.60 pad.61 pad.70 R43.2 U2.20 | length 2325.8
  Top Layer w7: U2.20 730.72,1474.25 858.64,1474.25 950.95,1381.94 963.02,1381.94 1155.96,1189 1186,1189 1224.5,1150.5 1544.5,1150.5 pad.70 1660,1035 1700,1035 1723.5,1058.5 1723.5,1195.43 1846.57,1318.5 1958.02,1318.5 1986.52,1290 pad.61 ; R43.2@2235,1164.5 R43.2 2240,1240 pad.60
  Top Layer w10: B3.7 2180,1165 2234.5,1165 R43.2@2235,1164.5
  Bottom Layer w7: pad.61 2145,1245 pad.60
DCOUPL1: C37.2 U2.56 | length 71.5
  Top Layer w7: C37.2@348.11,1373 350.63,1375.51 U2.56
DCOUPL2: C38.2 U2.32 | length 235.2
  Top Layer w7: U2.32 643.68,1659.43 643.68,1679.87 651.59,1687.78 745.07,1687.78 755.56,1677.3 804.44,1677.3 836.89,1709.74 C38.2
ELIVE_OUT2: B5.4 R23.2 TR2.8 | length 741.3
  Top Layer w40: R23.2 282,159 465.95,159 TR2.8
  Top Layer w80: 380,135 380,85 390,75 647.76,75 B5.4
ELIVE_OUT3: B6.4 R31.1 TR3.7 | length 459.5
  Top Layer w50: TR3.7 3661.92,186 3740,186 3843,186 R31.1
  Top Layer w80: 3740,186 3740,135 B6.4
GND: B1.4 B2.4 B3.4 B4.3 B5.3 B6.3 B7.3 C1.1 C3.2 C5.1 C7.2 C9.1 C11.2 C12.1 C14.2 C16.1 C18.2 C19.2 C20.2 C21.2 C22.2 C23.1 C24.1 C25.1 C26.1 C27.1 C28.1 C29.1 C30.1 C31.1 C32.1 C35.1 C37.1 C38.1 C39.1 C40.1 C41.1 D1.2 D2.2 D3.2 D4.2 L3.1 P1.5 pad.24 pad.25 pad.26 pad.27 pad.89 pad.92 pad.93 pad.94 pad.95 pad.96 Q2.2 Q4.2 Q6.2 Q8.2 R8.1 R9.2 R65.1 U1.2 U2.1 U2.2 U2.3 U2.4 U2.57 U2.V X1.2 X1.4 | length 2222.3
  Top Layer w7: C27.1 309.89,1376 C37.1 310.89,1368.11 330.5,1348.5 446.55,1348.5 U2.1 U2.2 U2.3 485.92,1350.68 U2.57@512.5,1377.27 ; C32.1 303.35,1638.54 R65.1 303.35,1686.38 327.28,1710.31 C31.1@418.47,1710.31 ; C30.1 416.89,1711.89 C31.1@418.47,1710.31 ; C31.1 418.78,1710.31 C31.1@418.47,1710.31 ; C29.1 616.65,1789.76 L3.1 ; pad.92 741,1834 C40.1 ; C25.1 800,1290 833,1257 967.75,1257 1126.75,1098 1130,1098 pad.93 ; C23.1 C26.1 872.48,1540 884.98,1527.5 957.5,1527.5 969.56,1539.56 969.56,1613.56 C38.1 ; C7.2 C5.1 ; C11.2 C9.1 ; C1.1 C3.2 ; C12.1 C14.2 ; C16.1 C18.2
  Top Layer w10: R8.1 2171.5,1633.25 R9.2
LIVE_IN1: B4.2 T2.2 | length 732.7
  Top Layer w80: B4.2 90,1477.48 90,2010 147.8,2067.8 T2.2
LIVE_IN2: R23.1 T3.2 TR2.7 | length 1350.2
  Top Layer w40: R23.1 282,470 347,535 400,535 451.95,535 TR2.7
  Top Layer w80: T3.2 82.8,977.8 82.8,722.2 110,695 350,695 400,645 400,535
LIVE_IN3: R31.2 T4.2 TR3.8 | length 1265
  Top Layer w50: TR3.8 3678.25,560 3725,560 3783,560 3843,500 R31.2
  Top Layer w80: 3725,560 3725,650 3765,690 3975,690 4020,735 4020,930 3995,955 T4.2
LIVE_IN4: B7.2 P1.1 pad.31 pad.37 R2.1 R39.1 T5.1 TR4.7 VR1.2 | length 5409.4
  Top Layer w10: VR1.2 1635.17,1378.25 R2.1
  Top Layer w20: pad.37 2075,1665 2710.8,2300.8 2784.2,2300.8 2791.3,2293.7 T5.1
  Top Layer w40: TR4.7 3422.09,710 3505,710 3603,710 R39.1
  Top Layer w80: pad.31 3505,710 ; T5.1 4020,2133.7 4020,1477.48 B7.2
  Bottom Layer w20: VR1.2 1778.15,1513.15 pad.37
  Bottom Layer w80: pad.31 3725,815 3725,1315 3836.22,1426.22 B7.2
LIVE_OUT1: pad.29 R15.1 T2.1 TR1.7 | length 1686
  Top Layer w40: R15.1 477,1020 542,1085 590,1085 641.95,1085 TR1.7
  Top Layer w80: pad.29 585,1090 590,1085
  Bottom Layer w80: T2.1 215,1830 110,1725 110,1585 235,1460 235,1310 405,1140 pad.29
LIVE_OUT2: B5.2 T3.1 | length 561.3
  Bottom Layer w80: B5.2 85,400.04 85,705 T3.1
LIVE_OUT3: B6.2 T4.1 | length 1018.2
  Bottom Layer w80: B6.2 3666.22,331.22 3876.06,541.06 T4.1
LIVE_OUT4: B7.4 pad.30 R39.2 T5.2 TR4.8 | length 1896.3
  Top Layer w40: TR4.8 3439.09,1085 3485,1085 3538,1085 3603,1020 R39.2
  Top Layer w80: B7.4 3572.44,1662.44 3670,1760 3670,2040 3726.85,2096.85 T5.2 ; 3485,1085 pad.30
  Bottom Layer w80: B7.4 3409.69,1255.31 pad.30
NetB1_2: B1.2 R7.1 R10.2 | length 819.2
  Top Layer w7: 3500,1570 R7.1
  Top Layer w10: R10.2 3240,1570 3265,1595 3475,1595 3500,1570 3505,1565 B1.2
NetB1_3: B1.3 R1.1 R6.2 | length 790.4
  Top Layer w10: R6.2 2974.5,1510 3134.75,1510 ; R1.1 3135,1509.75 3134.75,1510 ; B1.3 3455,1560 3450,1565 3350,1565 3295,1510 3134.75,1510
NetB1_8: B1.8 C4.2 | length 99.4
  Top Layer w7: B1.8 3556.3,1303.25 C4.2
NetB2_2: B2.2 R13.2 R14.1 | length 463.8
  Top Layer w10: R13.2 1935,995 1955,975 ; R14.1 1955,975 ; B2.2 1969,961 1955,975
NetB2_3: B2.3 R18.2 R19.1 | length 497.8
  Top Layer w10: R18.2 1770,865 ; R19.1 1759.5,854.5 1770,865 ; B2.3 1919,951 1905,965 1800,965 1785,950 1785,880 1770,865
NetB2_5: B2.5 R20.1 R22.2 | length 335.1
  Top Layer w10: R20.1 1840,600 ; R22.2 1840,560.5 1840,600 ; B2.5 1840,659.7 1840,600
NetB2_6: B2.6 R26.2 R27.1 | length 556.8
  Top Layer w10: R26.2 1880,460.5 1880,575 1919,614 ; B2.6 1919,614 ; R27.1 1919,480.5 1919,614
NetB2_8: B2.8 C8.2 | length 120.4
  Top Layer w10: B2.8 2050,657.7 C8.2
NetB3_2: B3.2 R29.2 R30.1 | length 554.5
  Top Layer w10: R30.1 2219.5,474.5 2220,475 ; B3.2 2180,620 2220,580 2220,475 ; R29.2 2335.5,355 2260,355 2220,395 2220,475
NetB3_3: B3.3 R34.2 R35.1 | length 475.2
  Top Layer w10: B3.3 2230,645 2255,620 2255,540 ; R34.2 2297.5,432.5 2255,475 2255,540 ; R35.1 2255,540
NetB3_5: B3.5 R36.1 R38.2 | length 348.7
  Top Layer w10: B3.5 2335,903.8 ; R38.2 2371.7,903.8 2335,903.8 ; R36.1 2335,815.5 2335,903.8
NetB3_6: B3.6 R42.2 R43.1 | length 370.7
  Top Layer w10: B3.6 2230,975 2240,985 ; R43.1 2240,985 ; R42.2 2262.5,1007.5 2240,985
NetB3_8: B3.8 C15.2 | length 110.4
  Top Layer w7: C15.2 2105,928.8 B3.8
NetB4_1: B4.1 pad.36 Q1.3 R45.1 R48.2 | length 2719.9
  Top Layer w7: B4.1 205,1730 pad.36 ; Q1.3 1055,2135 975,2055 R48.2 1139,1576 1139,1374 1105,1340 1105,1289.81 1171.81,1223 1219,1223 1253.06,1188.94 1658.94,1188.94 1680,1210 R45.1
  Bottom Layer w7: pad.36 930,1885 975,1840 R48.2
NetB5_1: B5.1 pad.32 Q3.3 R50.1 R53.2 | length 2006.3
  Top Layer w7: R53.2 1043.66,465 Q3.3 1193.66,556.34 1225,525 1410,525 pad.32
  Bottom Layer w7: B5.1 335,465 R53.2 ; pad.32 1700,70 R50.1
NetB6_1: B6.1 Q5.3 R55.1 R58.2 | length 1583.5
  Top Layer w7: Q5.3 3061.34,195 R58.2
  Bottom Layer w7: R55.1 2527.56,567.44 B6.1 3299.69,541.62 3212.01,453.94 3208.94,453.94 3150,395 3150,240 R58.2
NetB7_1: B7.1 pad.35 Q7.3 R60.1 R63.2 | length 2527.6
  Top Layer w7: pad.35 2825,1228.66 Q7.3 2816.34,1123.66 2855,1085 3285,1085 3320,1120 3320,1325 R63.2 3775,1425 3890,1310 B7.1
  Bottom Layer w7: R60.1 2825,1385 pad.35
NetC1_2: C1.2 C2.2 R5.1 R6.1 | length 572.4
  Top Layer w10: R5.1 2471.25,1378.25 C1.2 2539.5,1364.5 2590,1415 ; C2.2 2585,1420 2590,1415 ; R6.1 2810.5,1415 2590,1415
NetC2_1: C2.1 C3.1 R9.1 R10.1 | length 564.6
  Top Layer w10: R9.1 2472.25,1633.25 C3.1 2544.5,1620.5 2585,1580 ; C2.1 2585,1580 ; R10.1 2595,1570 2585,1580
NetC5_2: C5.2 C6.2 R12.1 R13.1 | length 466.2
  Top Layer w10: C5.2@1443.5,990 C5.2 1545,990.5 ; C6.2 1544,989.5 1545,990.5 ; R13.1 1621,990.5 1545,990.5
  Top Layer w20: R12.1 1334,990 C5.2@1443.5,990
NetC6_1: C6.1 C7.1 R17.1 R18.1 | length 486.9
  Top Layer w10: R17.1 1443.5,780 C7.1 1545,779.5 ; C6.1 1544,780.5 1545,779.5 ; R18.1 1624.5,844.5 1559.5,779.5 1545,779.5
NetC9_2: C9.2 C10.2 R21.1 R22.1 | length 523.7
  Top Layer w10: R21.1 1420,400 1460.5,440.5 C9.2 1600,440.5 ; C10.2 1600,357.11 1600,440.5 ; R22.1 1651,440.5 1600,440.5
NetC10_1: C10.1 C11.1 R25.1 R26.1 | length 582.2
  Top Layer w10: R25.1 1488.5,245 C11.1 1605,229.5 ; C10.1 1604,230.5 1605,229.5 ; R26.1 1690.5,270.5 1649.5,229.5 1605,229.5
NetC12_2: C12.2 C13.2 R28.1 R29.1 | length 570.2
  Top Layer w10: R29.1 2439.5,265.5 2478,227 2515,227 ; C13.2 2515,227 ; R28.1 2831,252 2630,252 C12.2 2515,227
NetC13_1: C13.1 C14.1 R33.1 R34.1 | length 483.2
  Top Layer w10: R34.1 2445,438 2510,438 ; C13.1 2510,363.11 2510,438 ; R33.1 2623,420 C14.1 2510,438
NetC16_2: C16.2 C17.2 R37.1 R38.1 | length 456.6
  Top Layer w10: R38.1 2547.5,797 2560,797 ; C17.2 2565,802 2560,797 ; R37.1 2793,797 C16.2 2560,797
NetC17_1: C17.1 C18.1 R41.1 R42.1 | length 445.2
  Top Layer w10: R42.1 2480,1008 2565,1008 ; C17.1 2565,1008 ; R41.1 2748,1008 C18.1 2565,1008
NetC33_2: C33.2 C34.1 L3.2 | length 133.7
  Top Layer w7: C33.2 573.35,1786.46 L3.2@573.35,1835 ; L3.2@571,1837.35 L3.2@573.35,1835 ; C34.1 571,1838.35 L3.2 L3.2@573.35,1835
NetC34_2: C34.2 L1.1 L4.2 | length 152.1
  Top Layer w7: L4.2@515,1921.65 L4.2 515,1958.35 L1.1 570,1963.35 570,1927.11 C34.2
NetC35_2: C35.2 L1.2 L2.1 | length 118.3
  Top Layer w7: L1.2 545,2088.11 C35.2 545,2091.89 L2.1
NetC36_2: C36.2 C41.2 L4.1 | length 118.4
  Top Layer w7: C36.2 513.11,1776.22 C41.2 515,1821.89 L4.1
NetD1_1: D1.1 R48.1 | length 117.1
  Top Layer w7: R48.1 1085,1440 D1.1
NetD2_1: D2.1 R53.1 | length 158.5
  Top Layer w7: R53.1 1040.12,59.88 D2.1
NetD3_1: D3.1 R58.1 | length 177.8
  Top Layer w7: D3.1 3195,510.12 R58.1
NetD4_1: D4.1 R63.1 | length 327.5
  Top Layer w7: D4.1 3220,1805 R63.1
NetQ1_1: Q1.1 Q2.3 R44.1 | length 903.1
  Top Layer w7: Q2.3 1159,1309 1159,1465 ; R44.1 1159,1465 ; Q1.1 1246.34,1921.34 1159,1834 1159,1465
NetQ3_1: pad.33 Q3.1 Q4.3 R49.1 | length 849.6
  Top Layer w7: Q4.3 1176.69,146.69 1200,170 R49.1 ; Q3.1 1357.8,577.2 pad.33
  Bottom Layer w7: pad.33 1295,510 1295,275 R49.1
NetQ5_1: pad.34 Q5.1 Q6.3 R54.1 | length 785.7
  Top Layer w7: R54.1 2745,505 2935,505 2963.31,533.31 Q6.3 ; pad.34 2871.46,130 Q5.1
  Bottom Layer w7: R54.1 2790,410 pad.34
NetQ7_1: pad.41 Q7.1 Q8.3 R59.1 | length 1010.3
  Top Layer w7: R59.1 2885,1640 2930,1685 2930,1741.69 Q8.3 ; Q7.1 2750,1274.13 pad.41
  Bottom Layer w7: R59.1 2675,1600 2875,1400 2875,1305 2840,1270 2820,1270 pad.41
NetR2_2: R2.2 R3.1 | length 130.5
  Top Layer w10: R2.2 R3.1
NetR3_2: R3.2 R4.1 | length 131
  Top Layer w10: R3.2 R4.1
NetR4_2: R4.2 R5.2 R8.2 | length 286
  Top Layer w10: R8.2 R4.2 R5.2
NetR12_2: R12.2 R16.2 TR1.3 | length 301.9
  Top Layer w20: TR1.3 943.67,962.83 R16.2 1148.5,922.5 R12.2
NetR16_1: R16.1 R17.2 TR1.1 | length 321.6
  Top Layer w10: R16.1 1051.5,780 R17.2
  Top Layer w20: TR1.1 953.67,817.17 R16.1
NetR21_2: R21.2 R24.2 TR2.3 | length 508.9
  Top Layer w10: R24.2 1151,380 R21.2
  Top Layer w20: TR2.3 766.17,412.83 R24.2
NetR24_1: R24.1 R25.2 TR2.1 | length 527.6
  Top Layer w10: R24.1 1111,305 R25.2
  Top Layer w20: TR2.1 761.17,267.17 R24.1
NetR28_2: R28.2 R32.2 TR3.3 | length 537.7
  Top Layer w10: R28.2 3252.5,255 R32.2
  Top Layer w20: R32.2 3350.5,292 TR3.3
NetR32_1: R32.1 R33.2 TR3.1 | length 523
  Top Layer w10: R33.2 2971.5,397.5 R32.1
  Top Layer w20: R32.1 3360.17,437.67 TR3.1
NetR37_2: R37.2 R40.2 TR4.3 | length 303.5
  Top Layer w10: R37.2 3037.5,815 R40.2
  Top Layer w20: R40.2 3101.33,816.17 TR4.3
NetR40_1: R40.1 R41.2 TR4.1 | length 302.7
  Top Layer w10: R41.2 3047.5,945 R40.1
  Top Layer w20: R40.1 3109.33,961.83 TR4.1
NetR65_2: R65.2 U2.42 | length 110.9
  Top Layer w7: R65.2 346.65,1684.3 421.69,1684.3 U2.42
NEUTRAL_IN: P1.2 T5.3 VR1.1 | length 4384.3
  Top Layer w10: VR1.1 1409.72,1645.28 1483.25,1571.75 2110,1571.75
  Bottom Layer w20: VR1.1@1409.72,1910 VR1.1 1897.87,2395 2385,2395 ; P1.2@2381.2,2310 2381.2,2391.2 2385,2395 ; T5.3@3850,1910 T5.3 4005,2045 4005,2285 3895,2395 2385,2395
REL_CTRL1: pad.76 Q2.1 R45.2 U2.14 | length 1051.6
  Top Layer w7: U2.14 713.6,1347.57 818,1243.17 818,1241.86 819.86,1240 949.6,1240 1120,1069.6 pad.76 ; Q2.1 1347.4,1262.6 R45.2
  Bottom Layer w7: pad.76 1305,1230 R45.2
REL_CTRL2: pad.62 pad.77 Q4.1 R50.2 U2.13 | length 2352.6
  Top Layer w7: U2.13 683.05,1347.29 683.05,1321.59 696.75,1307.89 729.24,1307.89 801,1236.12 801,1234.82 815.82,1220 945.56,1220 1070,1095.56 1070,1075 pad.77 ; Q4.1 1280.71,70 R50.2 1555,70 1745,260 pad.62
  Bottom Layer w7: pad.77 1050,1045 1342.5,752.5 1422.5,752.5 1805,370 pad.62
REL_CTRL3: pad.78 Q6.1 R55.2 U2.12 | length 3200
  Top Layer w7: U2.12 663.36,1347.29 663.36,1317.23 689.71,1290.89 722.2,1290.89 784,1229.08 784,1227.78 811.78,1200 941.52,1200 1009,1132.52 1009,1089 965,1045 pad.78 ; R55.2 2869.29,620 Q6.1
  Bottom Layer w7: pad.78 1265,735 1404.6,735 1760,379.6 1760,243.48 1788.48,215 1870,215 1905,250 2088.08,250 2096.1,258.02 2193.02,258.02 2193.02,261.5 2218.5,286.98 2218.5,421.57 2457.99,661.06 2492.01,661.06 2533.07,620 R55.2
REL_CTRL4: pad.85 pad.86 Q8.1 R60.2 U2.11 | length 3409.7
  Top Layer w7: U2.11 643.68,1347.29 643.68,1312.87 682.67,1273.89 715.16,1273.89 767,1222.04 767,1220.73 812.73,1175 905,1175 pad.85 ; pad.86 1320,1320 1320,1835.96 1327,1842.96 1327,1942 1390,2005 1460,1935 1460,1933.94 1473,1920.94 1473,1742.96 1515.96,1700 1730,1700 1808.5,1621.5 2064.73,1621.5 2213.23,1770 2381.93,1770 2422.99,1728.94 2457.01,1728.94 2498.07,1770 R60.2 2834.29,1770 Q8.1
  Bottom Layer w7: pad.85 1120,1120 pad.86
REL_ON_OFF1: C19.1 pad.46 pad.87 R46.1 R47.1 U2.9 | length 2691.7
  Top Layer w7: pad.87 355,1250 440,1165 510,1165 541.5,1196.5 596.5,1196.5 604.03,1204.03 U2.9 ; pad.46 1525,2070 1620,1975 R47.1 ; C19.1 1645,1971.22 R47.1 ; R46.1 1645,1978.78 R47.1
  Bottom Layer w7: pad.87 379,1329 756,1329 828.5,1256.5 1141.5,1256.5 1287,1402 1287,1907 pad.46
REL_ON_OFF2: C20.1 pad.50 pad.67 R51.1 R52.1 U2.8 | length 2201.8
  Top Layer w7: pad.67 584.34,1279.34 U2.8 ; pad.50 1765,160 R52.1 ; R51.1 1855,163.78 R52.1 ; C20.1 1858.78,96.22 R52.1
  Bottom Layer w7: pad.67 575,1270 735,1270 875,1130 875,1010 1190,695 1396.52,695 1715,376.52 1715,210 pad.50
REL_ON_OFF3: C21.1 pad.51 pad.66 R56.1 R57.1 U2.7 | length 3037.7
  Top Layer w7: pad.66 475,1265 490,1280 522.79,1280 564.38,1321.59 564.38,1347.29 U2.7 ; R56.1 R57.1 ; C21.1 R57.1 ; pad.51 R57.1
  Bottom Layer w7: pad.66 475,1275 495,1295 740,1295 905,1130 905,1025 1215,715 1400.56,715 1735,380.56 1735,244.44 1789.44,190 1885,190 1923.5,228.5 2168.02,228.5 2211.52,185 pad.51
REL_ON_OFF4: C22.1 pad.47 pad.65 R61.1 R62.1 U2.6 | length 2830.3
  Top Layer w7: pad.65 450,1305 523.75,1305 544.69,1325.94 544.69,1347.29 U2.6 ; R61.1 2176.22,1881.22 R62.1 ; C22.1 2175,1976.22 R62.1 ; pad.47 R62.1
  Bottom Layer w7: pad.65 435,1280 467,1312 747.04,1312 819.54,1239.5 1148.54,1239.5 1305,1395.96 1305,1620 1553.13,1868.13 1603.07,1868.13 1753.44,2018.5 1823.02,2018.5 1910.02,1931.5 2018.02,1931.5 2061.52,1975 pad.47
RESET: pad.58 R64.2 | length 98.6
  Top Layer w7: R64.2@855,1645 R64.2 903,1593.65 pad.58
RESET_N: C23.2 R64.1 U2.28 | length 137.1
  Top Layer w7: U2.28 794.83,1631.49 R64.1@806.89,1643.54 ; C23.2 R64.1@806.89,1643.54 ; R64.1 R64.1@806.89,1643.54
RF_N: C36.1 U2.38 | length 80.9
  Top Layer w7: C36.1 505,1699.88 525.01,1679.87 525.01,1659.71 U2.38
RF_P: C33.1 U2.37 | length 77
  Top Layer w7: U2.37@545.25,1659.71 U2.37 544.97,1699.01 555,1709.04 C33.1
S1Input: pad.20 R47.2 | length 123.8
  Top Layer w7: R47.2 pad.20
S2Input: pad.22 R52.2 | length 104.1
  Top Layer w7: R52.2 1916.22,185 pad.22
S3Input: pad.23 R57.2 | length 97.6
  Top Layer w7: pad.23 R57.2
S4Input: pad.21 R62.2 | length 143.8
  Top Layer w7: pad.21 R62.2
SLIVE_IN1: B4.4 pad.28 R15.2 TR1.8 | length 1061.8
  Top Layer w40: R15.2 477,714 575,714 660.95,714 TR1.8
  Top Layer w80: pad.28 575,714
  Bottom Layer w80: pad.28 685.31,735.31 B4.4
TCK: pad.14 U2.47 | length 527.2
  Top Layer w7: pad.14 89.04,1275 202,1387.96 202,1472 294,1564 382.79,1564 393.78,1553.01 418.28,1553.01 U2.47
TDI: pad.16 U2.49 | length 616.1
  Top Layer w7: pad.16 120,1176.67 120,1215 240,1335 240,1450 316,1526 372.71,1526 385.08,1513.63 418.28,1513.63 U2.49
TDO: pad.15 U2.48 | length 564.6
  Top Layer w7: pad.15 65,1208 220,1363 220,1460 305,1545 377.75,1545 389.43,1533.32 418.28,1533.32 U2.48
TMS: pad.13 U2.46 | length 526.8
  Top Layer w7: pad.13@82.59,1334.08 pad.13 141.67,1351.67 185,1395 185,1480 286,1581 389.83,1581 398.13,1572.7 418.28,1572.7 U2.46
VCC: C4.1 C8.1 C15.1 P1.3 pad.39 pad.40 pad.42 R11.1 | length 5654.4
  Top Layer w7: P1.3 1550.2,1910.2 1490,1850 1490,1750 1515,1725 2010,1725 pad.42 ; pad.40 C8.1 ; C15.1 2100,1111.18 pad.39 2120,1210 2200,1290 2360,1290 ; R11.1 3204.5,1115 2915,1115 2875,1155 2875,1360 2850,1385 2645,1385 2550,1290 2360,1290 ; C4.1 3692.93,1240 3460,1240 3337,1117 3337,1112.96 3284.04,1060 2420,1060 2360,1120 2360,1290
  Bottom Layer w7: pad.42 2015,1240 2025.79,1224.14 pad.39 2100,380 pad.40
VCC3.3: C24.2 C25.2 C26.2 C27.2 C28.2 C29.2 C30.2 C31.2 C32.2 P1.4 pad.54 pad.55 pad.56 pad.57 pad.80 pad.83 pad.88 pad.90 Q1.2 Q3.2 Q5.2 Q7.2 R44.2 R46.2 R49.2 R51.2 R54.2 R56.2 R59.2 R61.2 U2.10 U2.15 U2.24 U2.33 U2.36 U2.39 U2.40 U2.41 U2.43 U2.55 | length 19443.1
  Top Layer w7: pad.90 260,1125 260,1425 295,1460 340,1460 pad.80 345.19,1426.01 345.13,1422.01 345,1413.11 348.11,1410 378.07,1410 392.58,1395.49 418.28,1395.49 U2.55 ; U2.43 418.28,1631.2 348.11,1631.2 C32.2 348.11,1613.11 335,1600 290,1600 261,1629 261,1755 334,1828 430,1828 ; pad.56 430,1828 ; U2.41 U2.40 ; U2.39 U2.40 ; U2.36@564.94,1659.71 U2.36 564.66,1694.66 575.68,1705.68 575.68,1708.04 623.42,1755.78 625.78,1755.78 646.11,1776.11 C29.2 653.11,1790 653.11,1973.11 pad.57 871,2040 900,2011 pad.88 ; U2.10 623.99,1347.29 623.99,1283.11 C24.2 649.4,1283.11 675.62,1256.89 708.11,1256.89 750,1215 750,1213.69 828,1135.69 pad.83 ; U2.33 623.99,1659.43 623.99,1679.87 626.68,1682.55 626.68,1686.91 644.54,1704.78 728.56,1704.78 C28.2 754.69,1720 754.69,1702.2 762.6,1694.3 797.4,1694.3 805.31,1702.2 805.31,1721.53 837.78,1754 893,1754 998,1649 998,1533 ; U2.15 782.6,1375.51 C25.2 841.89,1358.11 860,1340 pad.55 pad.55@855,1310 ; U2.24 794.16,1552.72 C26.2 806.89,1528.11 820,1515 825,1515 825.71,1514.3 874.14,1514.3 877.94,1510.5 975.5,1510.5 998,1533 ; pad.54 1022,1533 998,1533 ; R44.2 1310,1850 1310,2172.8 ; Q1.2 1310,2172.8 ; Q3.2 1497.2,652.8 1555,595 1555,535 1533.8,513.8 1443.8,513.8 R49.2 ; P1.4 2110.74,1783.3 R61.2 2107.44,1847.56 2035,1920 1935,1920 1753.78,2101.22 R46.2 1573.43,2172.8 1310,2172.8 ; R51.2 2013.78,256.22 2070,200 2070,155 2110,115 2195,115 2231.22,78.78 R56.2 2618.78,78.78 R54.2 2720,95 2762.8,52.2 Q5.2 ; R59.2 2675,1240.87 Q7.2 ; 430,1828 430,1822.25 453.11,1799.14 C30.2 453.11,1711.89 C31.2 485.92,1679.08 U2.40
  Bottom Layer w7: pad.80 295,1515 295,1905 pad.56 pad.57 ; pad.83 828,770 933,665 1331.52,665 1405,591.52 1405,475 R49.2 1400,255 1635,20 2715,20 2750,55 ; pad.88 789,1694 789,1376 pad.55 935,1305 1030,1400 pad.54 1225,1720 R44.2 ; P1.4 1749.72,1783.3 1771.43,1805 2370,1805 2445,1880 2493.07,1880 ; R59.2 2780,1235 2905,1235 2905,1445 2716.06,1633.94 2716.06,1657.01 2493.07,1880 ; R54.2 2720,85 2750,55 ; 2493.07,1880 3770,1880 4045,1605 4045,545 3655,155 3213.07,155 3212.01,153.94 3013.94,153.94 2915,55 2750,55
VOLTAGE_CH: B1.1 pad.75 pad.81 R7.2 U2.16 | length 4838.7
  Top Layer w7: U2.16 841.52,1395.2 922.78,1313.94 934.85,1313.94 1133.79,1115 1153.92,1115 1186.42,1082.5 1223.5,1082.5 pad.75 ; B1.1 3715,1514.55 ; R7.2 3714.5,1515.05 3715,1514.55 ; pad.81 3834.55,1514.55 3715,1514.55
  Bottom Layer w7: pad.75 1350,1170 1390,1170 1440,1220 1440,1645 1495,1700 1840,1700 1910,1770 1993.48,1770 1996.98,1773.5 2056.5,1773.5 2090,1740 2090,1475 2370,1195 2980,1195 3010,1225 3120,1225 3245,1100 3515,1100 3575,1160 3575,1255 pad.81
VREF: pad.43 pad.44 pad.45 pad.69 R1.2 R11.2 R19.2 R20.2 R35.2 R36.2 U1.1 U2.23 | length 4689.3
  Top Layer w7: U2.23 766.96,1533.03 802,1498 817.96,1498 818.67,1497.3 859.64,1497.3 957.99,1398.94 970.06,1398.94 1163,1206 1199,1206 1237.5,1167.5 1630,1167.5 1648.5,1149 1648.5,1090 pad.69 ; R20.2 1665,600 pad.44 1660,735 R19.2 ; R35.2 2439.5,555.5 pad.45 2425,640 2484.5,699.5 R36.2 ; U1.1 3133.5,1302 R1.2 ; pad.43 3130,1175 3135,1170
  Top Layer w10: R1.2 3135,1170 R11.2
  Bottom Layer w7: pad.69 1540,950 1540,760 pad.44 1650,615 1655.77,615 1845,425.77 1845,420 1882.5,382.5 1957.1,382.5 2002.5,337.1 2002.5,315.98 2033.48,285 2075,285 2114.5,324.5 2114.5,330.06 2130,345.56 2130,415 pad.45 2395,680 2580,680 pad.43
XOSC32M_Q1: C40.2 U2.34 X1.1 | length 419.6
  Top Layer w7: U2.34 604.31,1659.71 604.31,1684.23 609.68,1689.6 609.68,1693.95 637.5,1721.78 691.78,1721.78 710,1740 710,1772 728,1790 819,1790 829.64,1800.64 X1.1
XOSC32M_Q2: C39.2 U2.35 X1.3 | length 454.2
  Top Layer w7: U2.35 584.62,1659.71 584.62,1688.58 592.68,1696.64 592.68,1700.99 630.46,1738.78 645,1738.78 671.42,1765.2 671.42,1947.42 687,1963 C39.2 778.91,1963 X1.3
pads on no net: B1.5 B1.6 B1.7 TR1.2 TR1.4 TR1.5 TR1.6 TR2.2 TR2.4 TR2.5 TR2.6 TR3.2 TR3.4 TR3.5 TR3.6 TR4.2 TR4.4 TR4.5 TR4.6 U1.3 U2.5 U2.21 U2.22 U2.25 U2.26 U2.27 U2.29 U2.30 U2.31 U2.44 U2.45 U2.50 U2.51 U2.52 U2.53 U2.54

## Polygon pours and split planes (outlines as drawn)
GND on Top Layer "Top Layer-GND" (solid, pour order 14): 0,0 0,2220 518,2220 518,2000 487,2000 486,1999 486,1660 595,1660 595,2000 571,2000 571,2220 4100,2220 4100,0

## Other copper
Top Layer:
  pour cut-out: 1354,1599 1695,1599 1879,1783 2013,1783 2450,2220 2736.62,2220 2167,1650.38 2167,1318 2077.54,1318 1346,1318
  pour cut-out: 4100,2220 3124,2220 3124,1561 3461,1561 3461,1290 3224,1290 3199,1265 3199,0 4100,0
  pour cut-out: 0,2145 304,2145 304,1199 303,1198 304,1197 625,1197 625,1180 729.44,1075.56 866.97,1075.56 865,1073.59 865,584 762.8,584 762.8,195 823,195 825,193 825,0 0,0
  region net Antenna: 117.44,2339.13 117.44,2582.05 1124.53,2582.05 1124.53,2534.41 478.86,2534.41 478.86,2463.54 518.23,2463.54 518.23,2435.83 554.06,2399.92 554.06,2310 535.94,2310 535.94,2392.44 512.81,2415.91 392.24,2415.91 392.24,2463.54 431.61,2463.54 431.61,2495.04 203.27,2495.04 203.27,2389.92 518.23,2389.92 518.23,2310 470.98,2310 470.98,2339.13 439.49,2339.13 439.49,2310 392.24,2310 392.24,2339.13 117.44,2339.13
Bottom Layer:
  pour cut-out: 4100,1597 3192,1597 3192,159 4100,159
  pour cut-out: 0.01,2141 335,2141 335,1478 806.26,1478 823,1301.65 823,175 0.2,175

## Text inside footprints (layer, text, board x,y; h text height)
P1: Bottom Overlay "N" at 2410,2141.8 h80; Bottom Overlay "L" at 2790,2155.4 h80; Bottom Overlay "GND" at 1740.2,1621.78 h47.24; Bottom Overlay "3.3V" at 1750,1710 h47.24; Bottom Overlay "+5v" at 1740.2,1895.98 h47.24; Bottom Overlay "U1" at 2160,2472.9 h45
U2: Top Overlay "*" at 421.7,1307.72 h50 r90; Mechanical 13 "*" at 436.7,1372.41 h50 r90